# Altium PCB Kanaloa_v2.0.0_Power.PcbDoc (part 1 of 2)
Units mil, origin at the board's own origin, x right, y up, seen from the top; angles counter-clockwise.
Board outline 5000 x 6000 mil, 4 copper layers (Top Layer, GND, +24V, Bottom Layer), stack 62 mil thick; 146 components, 108 nets, 614 pads, 645 vias.
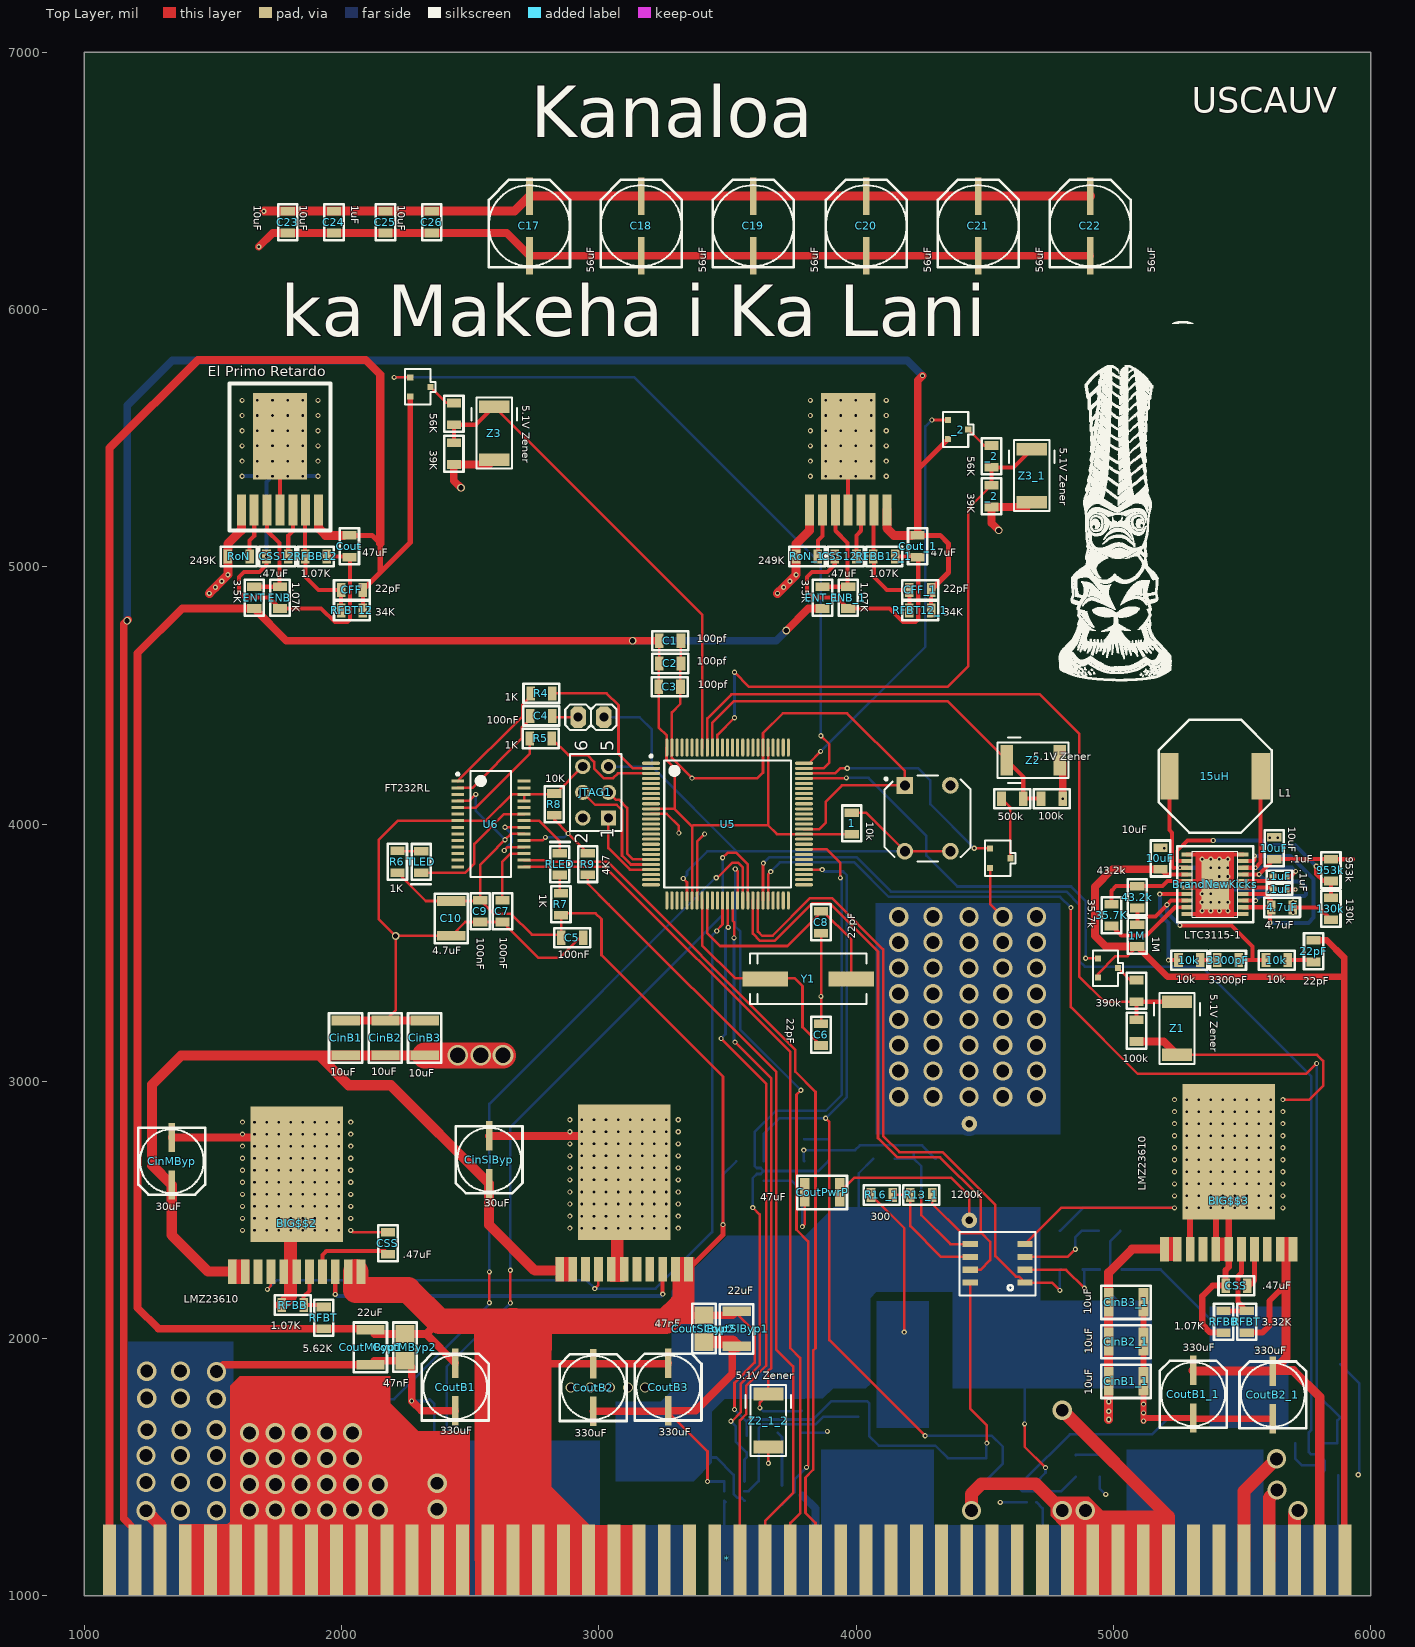
[diagram p0: Top Layer view]
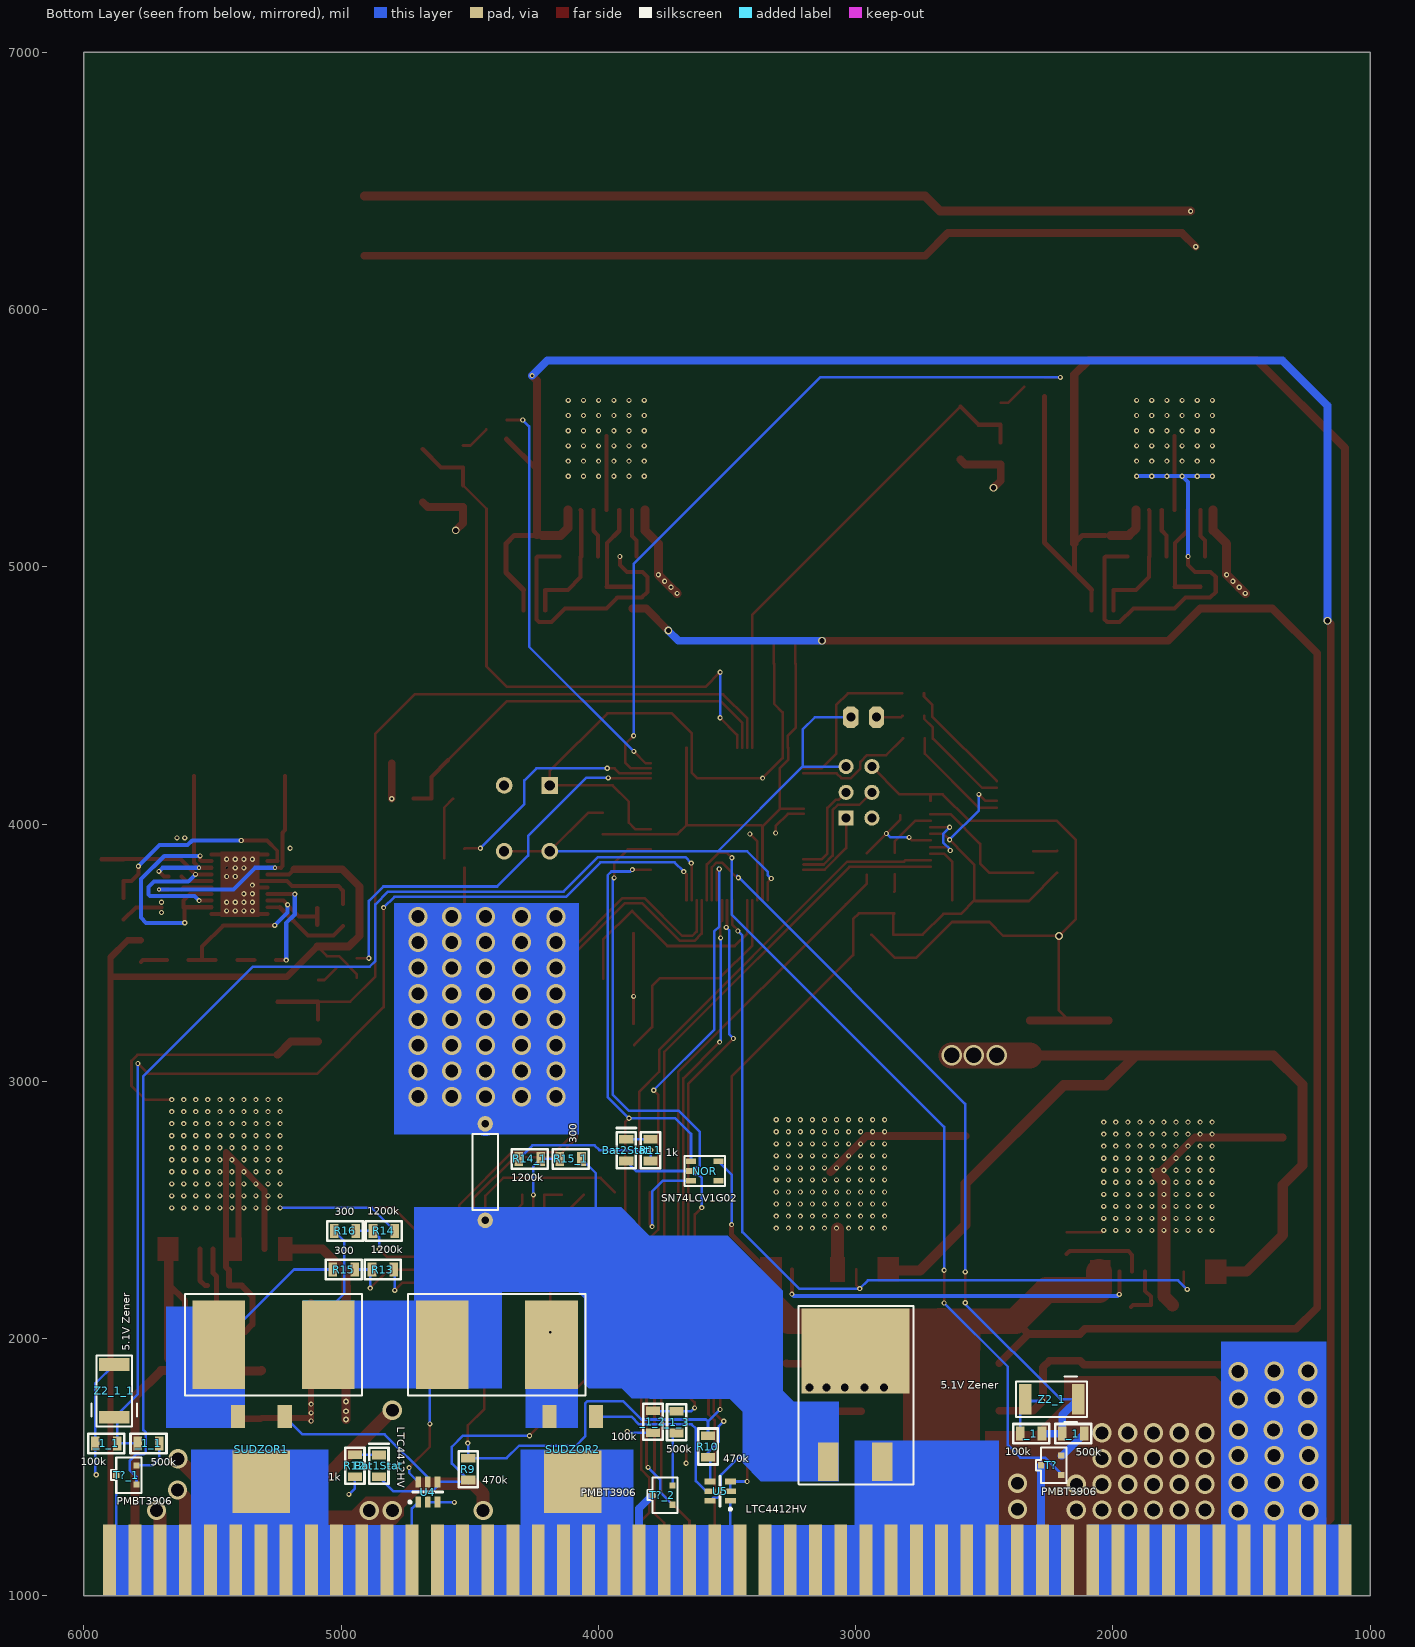
[diagram p1: Bottom Layer view, seen from below]
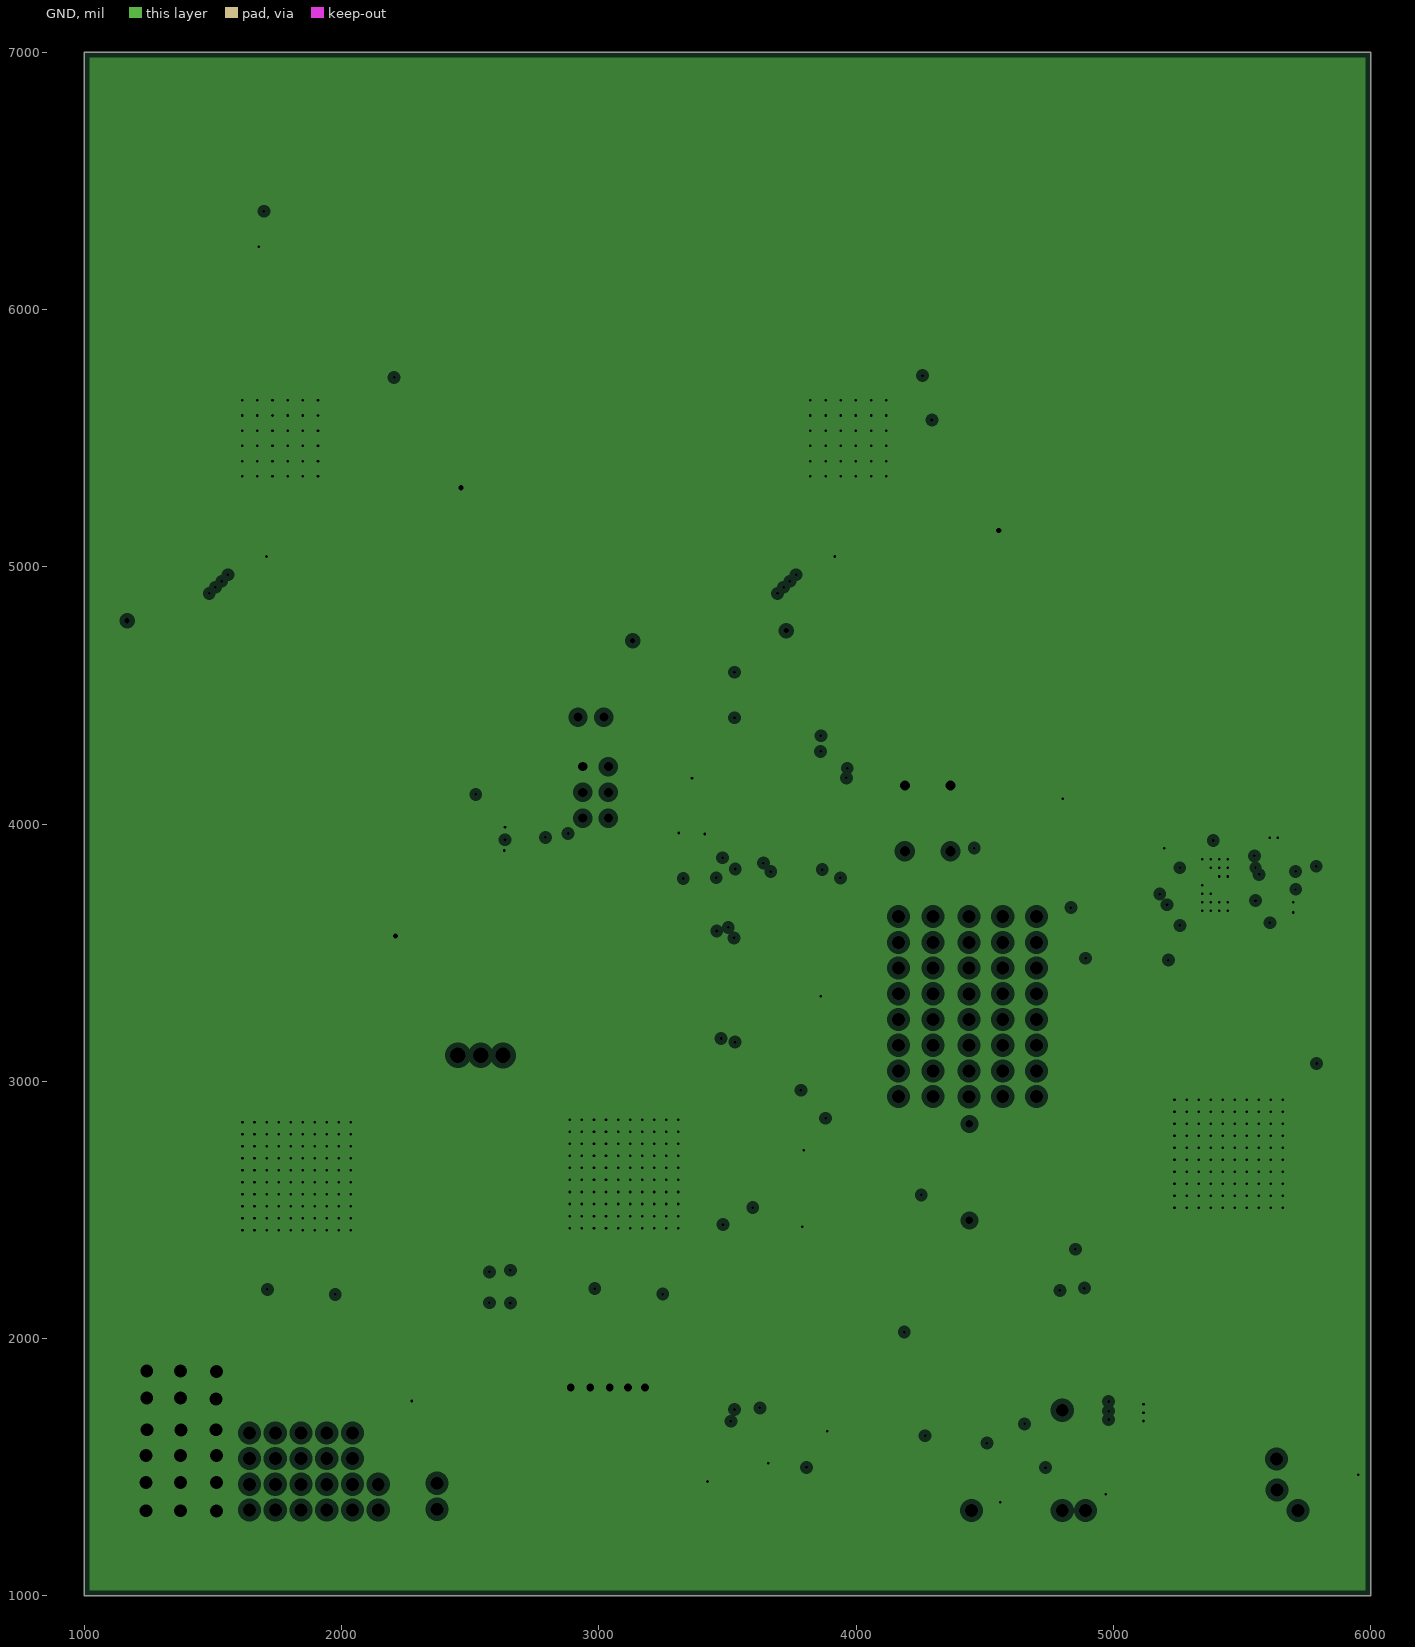
[diagram p2: GND, clearances drawn from the general rule]
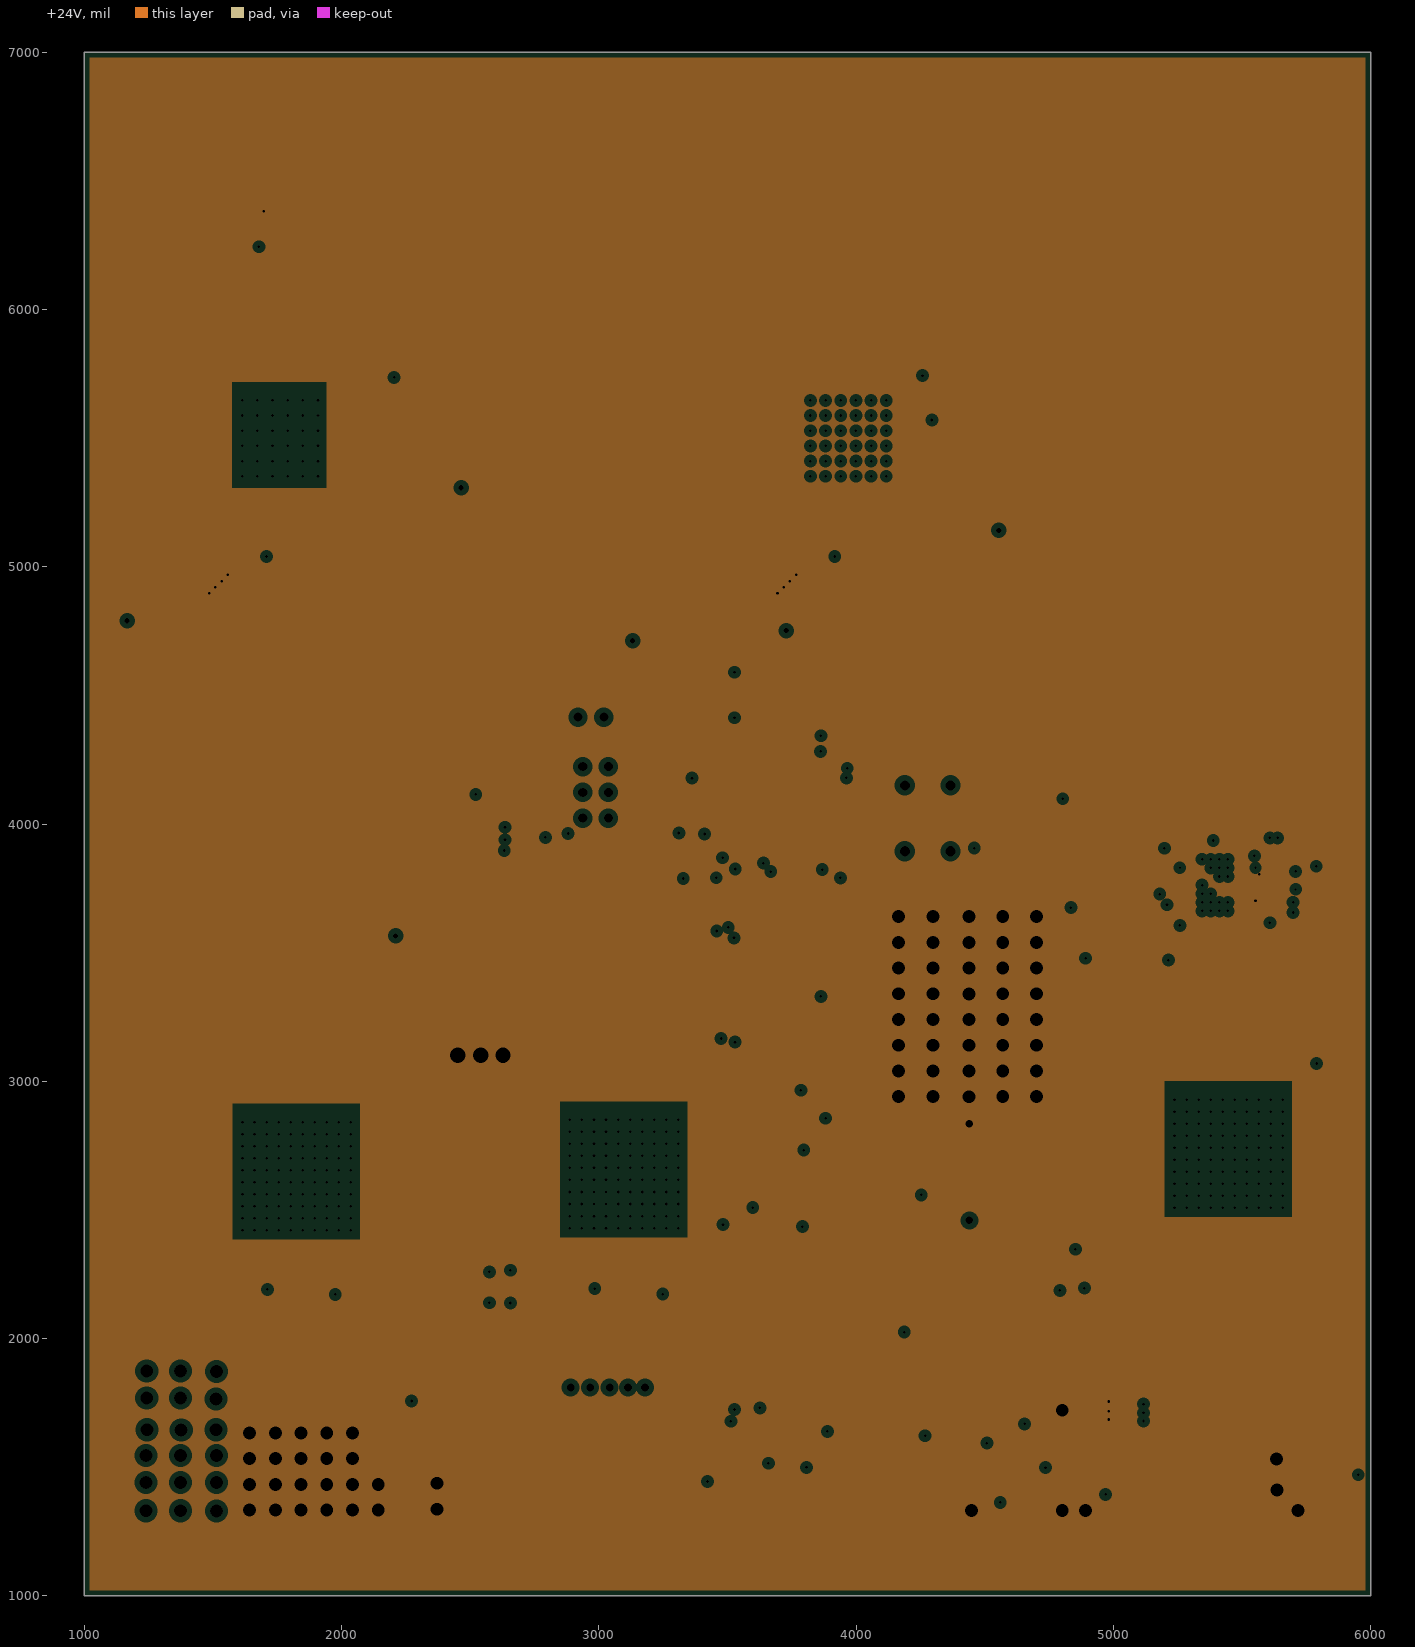
[diagram p3: +24V, clearances drawn from the general rule]

## Layer stack, top to bottom
Top Layer: signal copper 1.4
Dielectric: core 8.2, FR-4, Dk 4.8
GND: plane copper 1.4, net GND
Dielectric: prepreg 40, FR-4, Dk 4.8
+24V: plane copper 1.4, net +24V
Dielectric: core 8.2, FR-4, Dk 4.8
Bottom Layer: signal copper 1.4

## Board outline
1000,1000 1000,7000 6000,7000 6000,1000

## Design rules (kind name [scope] priority, off if disabled: settings)
Clearance [All] p1: gap=8
DiffPairsRouting [All] p1: maxlimit=10 minlimit=10 mostfreqgap=10 maxuncoupledlength=500
MinimumSolderMaskSliver [All] p1 off: minsoldermaskwidth=10
PlaneClearance [All] p1: clearance=20
PlaneConnect PlaneConnect_3 [(ObjectKind = 'Via') And (Net = '+24V') And (ViaDiameter = AsMils(80)) And (HoleDiameter = AsMils(60))] p1: planeconnectstyle=Direct reliefexpansion=20 reliefentries=4 reliefconductorwidth=10 reliefairgap=10
PlaneConnect PlaneConnect_2 [(ObjectKind = 'Via') And (Net = '+24V') And (ViaDiameter = AsMils(22)) And (HoleDiameter = AsMils(10))] p2: planeconnectstyle=Direct reliefexpansion=20 reliefentries=4 reliefconductorwidth=10 reliefairgap=10
PlaneConnect PlaneConnect_1 [(ObjectKind = 'Via') And (Net = 'GND') And (ViaDiameter = AsMils(20)) And (HoleDiameter = AsMils(10))] p3: planeconnectstyle=Direct reliefexpansion=20 reliefentries=4 reliefconductorwidth=10 reliefairgap=10
PlaneConnect [All] p4: planeconnectstyle=Relief reliefexpansion=20 reliefentries=4 reliefconductorwidth=10 reliefairgap=10
PolygonConnect [All] p1: connectstyle=Relief reliefconductorwidth=10 reliefentries=4 polygonreliefangle="90 Angle"
RoutingVias [All] p1: holewidth=28 width=50 viastyle="Through Hole" minholewidth=28 minwidth=50 maxholewidth=28 maxwidth=50
SilkToSilkClearance [All] p1 off: silktosilkclearance=10
SilkscreenOverComponentPads [All] p1 off: minsilkscreentomaskgap=10
SolderMaskExpansion [All] p1: expansion=4
Width [All] p1: maxlimit=710 minlimit=10 preferedwidth=10
22 further rules are at their usual default settings.

## Classes and differential pairs
component class "24 Volt Regulator": 1M 4.7uF 10k 10uF 15uH 35.7K 43.2k 130k 953k 3300pF .1uF BrandNewKicks Cff
component class "5 Volt Regulator": BIG$$2
component class "12 Volt Regulator": Cout ENB ENT RoN
component class Kanaloa_v2.0.0_Power: C17 C18 C19 C20 C21 C22 C23 C24 C25 C26 P1 P2 P3 P4 P5 P6 P7 P8 P9 P10 P11 P12 R9 R10 U4 U5
component class Microcontroller: 4.7uF C2 C3 C5 C6 C8 JTAG1 R4 R5 R6 R7 RLED TLED U5 USB1 Y1
differential pair NewDifferentialPair1: +"USB DP" -"USB DM"

## Components (designator, comment, footprint, x,y, rotation, side; value= is the part's Value field where it differs from the comment)
1 "10k" "R 0805 (2012) RESISTOR" 3983,4002 r270 top
1M "1M" "R 0805 (2012) RESISTOR" 5092.94,3565.92 r270 top (schematic designator Rtop)
4.7uF "4.7uF" "0805 (2012) Capacitor" 5655.54,3675.92 r0 top (schematic designator C1)
10k "10k" "R 0805 (2012) RESISTOR" 5635.54,3470.69 r180 top (schematic designator Rff)
10k "10k" "R 0805 (2012) RESISTOR" 5295.54,3470.69 r0 top (schematic designator Rfb)
10uF "10uF" "0805 (2012) Capacitor" 5182.94,3865.92 r90 top (schematic designator Co)
10uF "10uF" "0805 (2012) Capacitor" 5625.54,3905.92 r270 top (schematic designator Cin)
15uH "L1" WurstInductor 5395.54,4185.92 r90 top
22pF "22pF" "0805 (2012) Capacitor" 5778.38,3505.92 r90 top
35.7K "35.7k" "R 0805 (2012) RESISTOR" 4992.94,3645.92 r270 top (schematic designator Rt)
43.2k "43.2k" "R 0805 (2012) RESISTOR" 5092.94,3715.92 r270 top (schematic designator Rbot)
130k "130k" "R 0805 (2012) RESISTOR" 5845.54,3670.69 r270 top (schematic designator R2)
953k "953k" "R 0805 (2012) RESISTOR" 5845.54,3820.69 r270 top (schematic designator R1)
3300pF "3300pF" "0805 (2012) Capacitor" 5445.54,3470.69 r180 top (schematic designator Cfb)
* "EdgeCon" "5645235-3 CON" 5900,1140 r180 top
.1uF ".1uF" "0402 (1005) CAPACITOR" 5645.54,3745.92 r180 top (schematic designator Cbst2)
.1uF ".1uF" "0402 (1005) CAPACITOR" 5645.54,3795.92 r180 top (schematic designator Cbst1)
_1 "100k" "R 0805 (2012) RESISTOR" 2318,1630 r0 bottom
_1 "500k" "R 0805 (2012) RESISTOR" 2154,1630 r180 bottom
_1_1 "500k" "R 0805 (2012) RESISTOR" 5749,1592 r180 bottom
_1_1 "100k" "R 0805 (2012) RESISTOR" 5913,1592 r0 bottom
_1_2 "100k" "R 0805 (2012) RESISTOR" 3788,1676 r90 bottom
_1_3 "500k" "R 0805 (2012) RESISTOR" 3696,1675 r90 bottom
_2 "56K" "R 0805 (2012) RESISTOR" 4526.39,5429.09 r270 top
_2 "39K" "R 0805 (2012) RESISTOR" 4526.39,5274.56 r270 top
_2 "" PMBT_3906 4396.37,5533.6 r90 top
Bat1Stat "" "LED 0805" 4853.35,1504.55 r270 bottom
Bat2Stat "" "LED 0805" 3891.97,2732.26 r270 bottom
BIG$$2 "LMZ23610" LMZ23610 1862.02,2596.63 r0 top
BIG$$3 "LMZ23610" LMZ23610 5485.43,2684.17 r0 top
BrandNewKicks "LTC3115-1" LTC3115 5395.54,3765.92 r0 top
C1 "100pf" "0805 (2012) Capacitor" 3276.57,4712.6 r180 top
C2 "100pf" "0805 (2012) Capacitor" 3276.57,4624.02 r180 top
C3 "100pf" "0805 (2012) Capacitor" 3274.61,4533.46 r180 top
C4 "100nF" "0805 (2012) Capacitor" 2775.59,4420.28 r180 top
C5 "100nF" "0805 (2012) Capacitor" 2896,3558 r0 top
C6 "22pF" "0805 (2012) Capacitor" 3863.47,3181.07 r270 top
C7 "100nF" "0805 (2012) Capacitor" 2625,3661.42 r90 top (schematic designator C5)
C8 "22pF" "0805 (2012) Capacitor" 3863.47,3618.08 r90 top
C9 "100nF" "0805 (2012) Capacitor" 2538.39,3661.42 r90 top (schematic designator C5)
C10 "4.7uF" "1210 (3225) Capacitor" 2426.18,3632.87 r90 top
C17 "56uF" Radial_8mmDia_SME 2730,6325 r90 top
C18 "56uF" Radial_8mmDia_SME 3165,6325 r90 top
C19 "56uF" Radial_8mmDia_SME 3600,6325 r90 top
C20 "56uF" Radial_8mmDia_SME 4040,6325 r90 top
C21 "56uF" Radial_8mmDia_SME 4475,6325 r90 top
C22 "56uF" Radial_8mmDia_SME 4910,6325 r90 top
C23 "10uF" "0805 (2012) Capacitor" 1790,6340 r270 top
C24 "10uF" "0805 (2012) Capacitor" 1970,6340 r270 top
C25 "1uF" "0805 (2012) Capacitor" 2170,6340 r270 top
C26 "10uF" "0805 (2012) Capacitor" 2350,6340 r270 top
CFF "22pF" "0805 (2012) Capacitor" 2040,4910 r180 top
CFF_1 "22pF" "0805 (2012) Capacitor" 4249,4910 r180 top (schematic designator CFF)
CinB1 "10uF" "1210 (3225) Capacitor" 2015.75,3168.31 r90 top
CinB1_1 "10uF" "1210 (3225) Capacitor" 5049.21,1833.66 r180 top
CinB2 "10uF" "1210 (3225) Capacitor" 2170.28,3168.31 r90 top
CinB2_1 "10uF" "1210 (3225) Capacitor" 5049.21,1988.19 r180 top
CinB3 "10uF" "1210 (3225) Capacitor" 2322.83,3168.31 r90 top
CinB3_1 "10uF" "1210 (3225) Capacitor" 5049.21,2140.75 r180 top
CinMByp "30uF" Radial_6.3mmDia_SMD 1339.57,2688.98 r270 top
CinSlByp "30uF" Radial_6.3mmDia_SMD 2572.83,2694.88 r270 top
Cout "47uF" "0805 (2012) Capacitor" 2030,5080 r270 top
Cout_1 "47uF" "0805 (2012) Capacitor" 4239,5080 r270 top (schematic designator Cout)
CoutB1 "330uF" Radial_6.3mmDia_SMD 2441.93,1811.02 r90 top
CoutB1_1 "330uF" Radial_6.3mmDia_SMD 5310.04,1783.46 r90 top
CoutB2 "330uF" Radial_6.3mmDia_SMD 2978.35,1809.06 r90 top
CoutB2_1 "330uF" Radial_6.3mmDia_SMD 5620.08,1780.51 r90 top
CoutB3 "330uF" Radial_6.3mmDia_SMD 3268.7,1811.02 r90 top
CoutMByp1 "22uF" "1210 (3225) Capacitor" 2112.2,1965.55 r90 top
CoutMByp2 "47nF" "1206 (3216) Capacitor" 2246.06,1965.55 r90 top
CoutPwrP "47uF" "1210 (3225) Capacitor" 3868,2568 r180 top
CoutSlByp1 "22uF" "1210 (3225) Capacitor" 3535.43,2037.4 r90 top
CoutSlByp2 "47nF" "1206 (3216) Capacitor" 3408.46,2038.39 r90 top
CSS ".47uF" "0805 (2012) Capacitor" 2180,2370 r270 top
CSS ".47uF" "0805 (2012) Capacitor" 5478.41,2205.22 r0 top
CSS12 ".47uF" "0805 (2012) Capacitor" 1750,5040 r180 top (schematic designator CSS)
CSS12_1 ".47uF" "0805 (2012) Capacitor" 3959,5040 r180 top (schematic designator CSS)
ENB "1.07K" "R 0805 (2012) RESISTOR" 1760,4880 r90 top
ENB_1 "1.07K" "R 0805 (2012) RESISTOR" 3969,4880 r90 top (schematic designator ENB)
ENT "3.5K" "R 0805 (2012) RESISTOR" 1660,4880 r270 top
ENT_1 "3.5K" "R 0805 (2012) RESISTOR" 3869,4880 r270 top (schematic designator ENT)
JTAG1 "JTAG Header" HDR2X3 3037.01,4023.03 r90 top
NOR "SN74LCV1G02" SN74AHC1G00 3587,2651 r270 bottom
R4 "1K" "R 0805 (2012) RESISTOR" 2776.57,4507.87 r180 top
R5 "1K" "R 0805 (2012) RESISTOR" 2773.62,4332.68 r180 top
R6 "1K" "R 0805 (2012) RESISTOR" 2216.54,3853.35 r270 top
R7 "1K" "R 0805 (2012) RESISTOR" 2852,3688 r270 top
R8 "10K" "R 0805 (2012) RESISTOR" 2826.54,4076.35 r270 top (schematic designator R6)
R9 "4K7" "R 0805 (2012) RESISTOR" 2956.54,3844.35 r270 top (schematic designator R6)
R9 "470k" "R 0805 (2012) RESISTOR" 4505.91,1492.13 r90 bottom
R10 "470k" "R 0805 (2012) RESISTOR" 3574,1580 r90 bottom
R11 "1k" "R 0805 (2012) RESISTOR" 3797.48,2732.26 r270 bottom
R12 "1k" "R 0805 (2012) RESISTOR" 4946.85,1504.92 r270 bottom
R13 "1200k" "R 0805 (2012) RESISTOR" 4838,2268 r180 bottom
R13_1 "1200k" "R 0805 (2012) RESISTOR" 4253,2558 r0 top
R14 "1200k" "R 0805 (2012) RESISTOR" 4834,2418 r180 bottom
R14_1 "1200k" "R 0805 (2012) RESISTOR" 4267,2698 r0 bottom
R15 "300" "R 0805 (2012) RESISTOR" 4990,2268 r0 bottom
R15_1 "300" "R 0805 (2012) RESISTOR" 4108,2698 r180 bottom
R16 "300" "R 0805 (2012) RESISTOR" 4985,2418 r0 bottom
R16_1 "300" "R 0805 (2012) RESISTOR" 4100,2558 r180 top
RFBB "1.07K" "R 0805 (2012) RESISTOR" 1810,2130 r180 top
RFBB "1.07K" "R 0805 (2012) RESISTOR" 5428.41,2065.22 r90 top
RFBB12 "1.07K" "R 0805 (2012) RESISTOR" 1900,5040 r0 top (schematic designator RFBB)
RFBB12_1 "1.07K" "R 0805 (2012) RESISTOR" 4109,5040 r0 top (schematic designator RFBB)
RFBT "3.32K" "R 0805 (2012) RESISTOR" 5518.41,2065.22 r270 top
RFBT "5.62K" "R 0805 (2012) RESISTOR" 1930,2080 r90 top
RFBT12 "34K" "R 0805 (2012) RESISTOR" 2040,4830 r180 top (schematic designator RFBT)
RFBT12_1 "34K" "R 0805 (2012) RESISTOR" 4249,4830 r180 top (schematic designator RFBT)
RLED "LED" "LED 0805" 2848,3844 r270 top (schematic designator LED2)
RoN "249K" "R 0805 (2012) RESISTOR" 1600,5040 r0 top
RoN_1 "249K" "R 0805 (2012) RESISTOR" 3809,5040 r0 top (schematic designator RoN)
SUDZOR1 "" SUD50P04_13L 5310.04,1531.5 r0 bottom
SUDZOR2 "" SUD50P04_13L 4099.41,1531.5 r0 bottom
T? "PMBT3906" PMBT_3906 2240,1507 r270 bottom
T?_1 "PMBT3906" PMBT_3906 5835,1469 r270 bottom
T?_2 "PMBT3906" PMBT_3906 3751,1391 r270 bottom
TLED "LED" "LED 0805" 2309.06,3852.36 r90 top (schematic designator LED1)
U4 "LTC4412HV" SOT95P245X110-6N 4663,1403 r90 bottom
U5 "Atmega1280" Atmega1280 3500,4000 r0 top
U5 "LTC4412HV" SOT95P245X110-6N 3526.57,1406.5 r0 bottom
U6 "FT232RL" "FTDI 232 RL" 2580,4000 r0 top
Y1 "ECS-160-20-5P" CSM-7 3814,3398 r0 top
Z1 "5.1V Zener" DO-213AB_D 5247.31,3205.68 r270 top
Z2 "5.1V Zener" DO-213AB_D 4688.02,4247.92 r0 top
Z2_1 "5.1V Zener" DO-213AB_D 2238,1764 r0 bottom
Z2_1_1 "5.1V Zener" DO-213AB_D 5882,1796 r90 bottom
Z2_1_2 "5.1V Zener" DO-213AB_D 3659,1681 r270 top
Z3 "5.1V Zener" DO-213AB_D 2592.52,5519.69 r270 top
Z3_1 "5.1V Zener" DO-213AB_D 4682.89,5354.28 r270 top
? "" "Male 2X1" 2919,4415 r0 top
? "" AP358_SMD 4550,2217 r90 top
? "" WSLP5931L3000FE 4395,1976 r0 bottom
? "" WSLP5931L3000FE 5263,1976 r180 bottom
? "" PMBT_3906 2306,5699 r90 top
? "" PMBT_3906 4979,3440 r90 top
? "" PMBT_3906 4560,3867 r90 top
? "" FUZE 4439.96,2646.65 r0 bottom
? "39K" "R 0805 (2012) RESISTOR" 2436.02,5439.96 r270 top
? "56K" "R 0805 (2012) RESISTOR" 2436.02,5594.49 r270 top
? "390k" "R 0805 (2012) RESISTOR" 5089.83,3351.35 r90 top
? "100k" "R 0805 (2012) RESISTOR" 5089.83,3196.83 r270 top
? "500k" "R 0805 (2012) RESISTOR" 4607.31,4098.31 r180 top
? "100k" "R 0805 (2012) RESISTOR" 4760.85,4098.31 r180 top
? "" B3F-1000 4278,4022 r270 top
? "" VBT4045BP 3001,1781 r180 bottom

## Footprints (in the part's own frame and the unit in brackets; to place one, negate y for a bottom-side part, rotate by r counter-clockwise, add the part's x,y. Pads: shape width x height; smd on the part's side, far side on the other; paste and mask are expansions set on the pad)
"0402 (1005) CAPACITOR" [mm] "0402 (1005) Capacitor"
  rect 0.7x0.6 smd: 1(-0.65,0) 2(0.65,0)
  silkscreen extent -1.28,-0.55 1.28,0.55, body extent -0.6,-0.29 0.6,0.29, height 0.51
"0805 (2012) Capacitor" [mm] "0805 (2012) Capacitor"
  rect 0.85x1.4 smd: 1(-1.075,0) 2(1.075,0)
  silkscreen extent -1.78,-0.95 1.78,0.95, body extent -1.19,-0.65 1.19,0.65, height 0.85
"1206 (3216) Capacitor" [mm] "1206 (3216) Capacitor"
  rect 1.75x1.9 smd: 1(-1.325,0) 2(1.325,0)
  silkscreen extent -2.42,-1.15 2.45,1.15, body extent -1.73,-0.91 1.73,0.91, height 1.26
"1210 (3225) Capacitor" [mm] "1210 (3225) Capacitor"
  rect 0.95x2.8 smd: 1(-1.725,0) 2(1.725,0)
  silkscreen extent -2.45,-1.63 2.45,1.65, body extent -1.83,-1.43 1.83,1.43, height 1.81
"5645235-3 CON" [mil]
  rect 50x275 smd: 1(4802,0) 2(4704,0) 3(4606,0) 4(4508,0) 5(4410,0) 6(4312,0) 7(4214,0) 8(4116,0) 9(4018,0) 10(3920,0) 11(3822,0) 12(3724,0) 13(3626,0) 14(3528,0) 15(3430,0) 16(3332,0) 17(3234,0) 18(3136,0) 19(3038,0) 20(2940,0) 21(2842,0) 22(2744,0) 23(2646,0) 24(2548,0) 25(2450,0) 26(2352,0) 27(2254,0) 28(2156,0) 29(2058,0) 30(1960,0) 31(1862,0) 32(1764,0) 33(1666,0) 34(1568,0) 35(1470,0) 36(1372,0) 37(1274,0) 38(1176,0) 39(1078,0) 40(980,0) 41(882,0) 42(784,0) 43(686,0) 44(588,0) 45(490,0) 46(392,0) 47(294,0) 48(196,0) 49(98,0) 50(0,0)
  rect 50x275 smd far side: 51(4802,0) 52(4704,0) 53(4606,0) 54(4508,0) 55(4410,0) 56(4312,0) 57(4214,0) 58(4116,0) 59(4018,0) 60(3920,0) 61(3822,0) 62(3724,0) 63(3626,0) 64(3528,0) 65(3430,0) 66(3332,0) 67(3234,0) 68(3136,0) 69(3038,0) 70(2940,0) 71(2842,0) 72(2744,0) 73(2646,0) 74(2548,0) 75(2450,0) 76(2352,0) 77(2254,0) 78(2156,0) 79(2058,0) 80(1960,0) 81(1862,0) 82(1764,0) 83(1666,0) 84(1568,0) 85(1470,0) 86(1372,0) 87(1274,0) 88(1176,0) 89(1078,0) 90(980,0) 91(882,0) 92(784,0) 93(686,0) 94(588,0) 95(490,0) 96(392,0) 97(294,0) 98(196,0) 99(98,0) 100(0,0)
AP358_SMD [mm] "Dual Circuit OpAmp (Diodes)"
  rect 0.6x1.5 smd: 1(0,-2.7) 2(1.27,-2.7) 3(2.54,-2.7) 4(3.81,-2.7) 5(3.81,2.7) 6(2.54,2.7) 7(1.27,2.7) 8(0,2.7)
  silkscreen extent -1.25,-3.75 5,3.75, body extent -0.6,-3.02 4.42,3.02, height 1.6
Atmega1280 [mm] "TSQFP, 100-Leads, Body 14x14mm (max), Pitch 0.50mm, IPC Medium Density"
  oval 1.8x0.3 smd: 1(-7.55,6) 2(-7.55,5.5) 3(-7.55,5) 4(-7.55,4.5) 5(-7.55,4) 6(-7.55,3.5) 7(-7.55,3) 8(-7.55,2.5) 9(-7.55,2) 10(-7.55,1.5) 11(-7.55,1) 12(-7.55,0.5) 13(-7.55,0) 14(-7.55,-0.5) 15(-7.55,-1) 16(-7.55,-1.5) 17(-7.55,-2) 18(-7.55,-2.5) 19(-7.55,-3) 20(-7.55,-3.5) 21(-7.55,-4) 22(-7.55,-4.5) 23(-7.55,-5) 24(-7.55,-5.5) 25(-7.55,-6) 51(7.55,-6) 52(7.55,-5.5) 53(7.55,-5) 54(7.55,-4.5) 55(7.55,-4) 56(7.55,-3.5) 57(7.55,-3) 58(7.55,-2.5) 59(7.55,-2) 60(7.55,-1.5) 61(7.55,-1) 62(7.55,-0.5) 63(7.55,0) 64(7.55,0.5) 65(7.55,1) 66(7.55,1.5) 67(7.55,2) 68(7.55,2.5) 69(7.55,3) 70(7.55,3.5) 71(7.55,4) 72(7.55,4.5) 73(7.55,5) 74(7.55,5.5) 75(7.55,6)
  oval 0.3x1.8 smd: 26(-6,-7.55) 27(-5.5,-7.55) 28(-5,-7.55) 29(-4.5,-7.55) 30(-4,-7.55) 31(-3.5,-7.55) 32(-3,-7.55) 33(-2.5,-7.55) 34(-2,-7.55) 35(-1.5,-7.55) 36(-1,-7.55) 37(-0.5,-7.55) 38(0,-7.55) 39(0.5,-7.55) 40(1,-7.55) 41(1.5,-7.55) 42(2,-7.55) 43(2.5,-7.55) 44(3,-7.55) 45(3.5,-7.55) 46(4,-7.55) 47(4.5,-7.55) 48(5,-7.55) 49(5.5,-7.55) 50(6,-7.55) 76(6,7.55) 77(5.5,7.55) 78(5,7.55) 79(4.5,7.55) 80(4,7.55) 81(3.5,7.55) 82(3,7.55) 83(2.5,7.55) 84(2,7.55) 85(1.5,7.55) 86(1,7.55) 87(0.5,7.55) 88(0,7.55) 89(-0.5,7.55) 90(-1,7.55) 91(-1.5,7.55) 92(-2,7.55) 93(-2.5,7.55) 94(-3,7.55) 95(-3.5,7.55) 96(-4,7.55) 97(-4.5,7.55) 98(-5,7.55) 99(-5.5,7.55) 100(-6,7.55)
  silkscreen extent -7.67,-6.25 6.25,6.82, body extent -8,-8 8,8, height 1.03
B3F-1000 [mm] "OMRON Electronics Pushbutton Tactile SPST-NO 0.05A 24V"
  rect 1.65x1.65 hole 1: 1(-3.25,-2.25)
  round 1.65 hole 1: 2(3.25,-2.25) 3(-3.25,2.25) 4(3.25,2.25)
  silkscreen extent -4.25,-4.25 4.25,4.25, body extent -3.81,-3 3.89,3, height 4.3
CSM-7 [mm] "Quartz Crystal, SM; 2 Leads; Body 11.4 x 4.8 x 5 mm (LxWxH)"
  rect 4.5x1.5 smd: 1(-4.25,0) 2(4.25,0)
  silkscreen extent -5.75,-2.5 5.75,2.5
DO-213AB_D [mil] "Zener Diode 1.5V"
  rect 49x118 smd: N(-103,0) P(103,0)
  silkscreen extent -138,-89 138,89, body extent -102,-53 102,52, height 53
"FTDI 232 RL" [mm] "SOP, 28-Leads, Body 10.5x5.6mm (max), Pitch 0.65mm, IPC Medium Density"
  rect 1.25x0.3 smd: 1(-3.275,4.225) 2(-3.275,3.575) 3(-3.275,2.925) 4(-3.275,2.275) 5(-3.275,1.625) 6(-3.275,0.975) 7(-3.275,0.325) 8(-3.275,-0.325) 9(-3.275,-0.975) 10(-3.275,-1.625) 11(-3.275,-2.275) 12(-3.275,-2.925) 13(-3.275,-3.575) 14(-3.275,-4.225) 15(3.275,-4.225) 16(3.275,-3.575) 17(3.275,-2.925) 18(3.275,-2.275) 19(3.275,-1.625) 20(3.275,-0.975) 21(3.275,-0.325) 22(3.275,0.325) 23(3.275,0.975) 24(3.275,1.625) 25(3.275,2.275) 26(3.275,2.925) 27(3.275,3.575) 28(3.275,4.225)
  silkscreen extent -3.4,-5.25 2,5.25, body extent -3.93,-5.09 3.88,5.11, height 1.98
FUZE [mil]
  round 60 hole 30: 1(0,-187.52) 16(0,187.5)
  silkscreen extent -49,-148 49,148
HDR2X3 [mm] "Connector; Header; 3x2 Position"
  rect 1.5x1.5 hole 0.9: 1(0,0)
  round 1.5 hole 0.9: 2(0,2.54) 3(2.54,0) 4(2.54,2.54) 5(5.08,0) 6(5.08,2.54)
  silkscreen extent -1.27,-1.27 6.35,3.81
"LED 0805" [mm]
  rect 0.85x1.4 smd: 1(-1.075,0) 2(1.075,0)
  silkscreen extent -2.18,-0.95 1.78,0.97, body extent -1.19,-0.65 1.19,0.65, height 0.87
LMZ23610 [mm]
  rect 0.86x2.41 smd: 0(-7.29,-8.557) 1(-6.02,-8.557) 2(-4.75,-8.557) 3(-3.48,-8.557) 4(-2.21,-8.557) 5(-0.94,-8.557) 6(0.33,-8.557) 7(1.6,-8.557) 8(2.87,-8.557) 9(4.14,-8.557) 10(5.41,-8.557)
  rect 9.126x13.37 smd: 11(-0.94,1.043)
LTC3115 [mm] "TSSOP, 20-Leads, Body 6.6x4.5mm (max), Pitch 0.65mm, IPC Medium Density"
  rect 1.05x0.4 smd: 1(-2.775,2.925) 2(-2.775,2.275) 3(-2.775,1.625) 4(-2.775,0.975) 5(-2.775,0.325) 6(-2.775,-0.325) 7(-2.775,-0.975) 8(-2.775,-1.625) 9(-2.775,-2.275) 10(-2.775,-2.925) 11(2.775,-2.925) 12(2.775,-2.275) 13(2.775,-1.625) 14(2.775,-0.975) 15(2.775,-0.325) 16(2.775,0.325) 17(2.775,0.975) 18(2.775,1.625) 19(2.775,2.275) 20(2.775,2.925)
  rect 2.74x4.95 smd: 21(0,0)
  silkscreen extent -3.75,-3.75 3.75,3.75, body extent -3.16,-3.35 3.12,3.15, height 1.1
"Male 2X1" [mil]
  oct 60x85 hole 35: 1(0,0) 2(100,0)
  silkscreen extent -50,-50 150,50, body extent -50,-50 150,50, height 460
PMBT_3906 [mm] "PNP Switching Transistor"
  rect 0.6x0.6 smd: B(0.95,1) C(0,-1) E(-0.95,1)
  silkscreen extent -1.75,-1.5 1.75,1.5, body extent -1.45,-1.21 1.45,1.21, height 0.98
"R 0805 (2012) RESISTOR" [mm] "0805 (2012) Resistor"
  rect 0.85x1.4 smd: 1(-1.075,0) 2(1.075,0)
  silkscreen extent -1.78,-0.95 1.78,0.95, body extent -1.19,-0.65 1.19,0.65, height 0.85
Radial_6.3mmDia_SMD [mm] "Surface Mount Aluminum Electrolytic Capacitor"
  rect 2.9x0.65 smd: N(-2.35,0) P(2.35,0)
  silkscreen extent -3.3,-3.3 3.3,3.3, body extent -3.45,-3.3 3.55,3.3, height 7.7
Radial_8mmDia_SME [mm] "Surface Mount Aluminum Electrolytic Capacitor"
  rect 3.7x0.65 smd: N(-2.95,0) P(2.95,0)
  silkscreen extent -4.08,-4 4.58,4.03, body extent -4.92,-4.15 4.98,4.15, height 10.2
SN74AHC1G00 [mm]
  rect 0.55x1 smd: 10(-0.95,1.35) 11(0.95,1.35) 12(0,-1.35) 13(-0.95,-1.35) 14(0.95,-1.35)
  silkscreen extent -1.5,-2 1.5,2, body extent -1.5,-0.75 1.5,0.75, height 1.45
SOT95P245X110-6N [mm] "SOT23, 6-Leads, Body 3.0x2.6mm (max), Pitch 0.95mm, IPC Medium Density"
  rect 1.1x0.55 smd: 1(-1,0.95) 2(-1,0) 3(-1,-0.95) 4(1,-0.95) 5(1,0) 6(1,0.95)
  silkscreen extent -1.12,-1.5 0.05,1.9, body extent -1.41,-1.45 1.41,1.45, height 1
SUD50P04_13L [mil] "P CHANNEL POWER MOSFET"
  rect 224x243 smd: D(0,88.5)
  rect 55x90 smd: G(-90.55,-165) S(90.55,-165)
  body extent -130,-188 130,193, height 91
VBT4045BP [mil] "Vishay Shotkey Diode."
  rect 80x150 smd: 2(105,-260) ""(-105,-260)
  rect 420x330 smd: GND(0,170)
  silkscreen extent -221,-348 225,345, body extent -197,-297 197,319, height 188
WSLP5931L3000FE [mil] "Vishay Current Sense Resistor"
  rect 205x344 smd: 1(-212.5,0) 2(212.5,0)
  silkscreen extent -344,-197 344,197, body extent -203,-106 201,109, height 39
WurstInductor [mm]
  rect 4.6x1.8 smd: 1(0,4.5) 2(0,-4.5)
  silkscreen extent -5.59,-5.59 5.59,5.59, body extent -5,-5.07 5,4.93, height 3.81

## Part data
1M 10k 10k 35.7K 43.2k 130k 953k ENB ENB_1 ENT ENT_1 R4 R5 R6 R7 R8 R9 R9 R10 RFBB RFBB RFBB12 RFBB12_1 RFBT RFBT RFBT12 RFBT12_1 RoN RoN_1: library part Resistor, "Resistor"
4.7uF 10uF 10uF 3300pF .1uF .1uF C4 C5 C7 C9 C23 C24 C25 C26 CFF CFF_1 Cout Cout_1 CSS CSS CSS12 CSS12_1: library part "Capacitor (non-polarized)", "Capacitor"
15uH: library part Inductor
C1 C2 C3 C6 C8: library part Cap, "Capacitor"
C17 C18 C19 C20 C21 C22: library part "Capacitor (polarized)", "Capacitor (polarized)"
JTAG1: library part "Header 3X2", "Header, 3-Pin, Dual row"
RLED TLED: "Standard LED"
U4 U5: library part LTC4412, "Low Loss Power Path Controller in Thin SOT"
Y1: library part ECS-120-32-1, "Crystal Oscillator"

## Free pads (board coordinates)
  rect 35.04x120.47 smd: 0(1610,5220) 0(3819,5220) 1(1660,5220) 1(3869,5220) 2(1710,5220) 2(3919,5220) 3(1760,5220) 3(3969,5220) 4(1810,5220) 4(4019,5220) 5(1860,5220) 5(4069,5220) 6(1910,5220) 6(4119,5220)
  rect 33.86x94.88 smd: 0(2847.95,2268.86) 1(2897.95,2268.86) 2(2947.95,2268.86) 3(2997.95,2268.86) 4(3047.95,2268.86) 5(3097.95,2268.86) 6(3147.95,2268.86) 7(3197.95,2268.86) 8(3247.95,2268.86) 9(3297.95,2268.86) 10(3347.95,2268.86)
  rect 210.63x336.22 smd: 7(1760,5507.6) 7(3969,5507.6)
  rect 359.29x526.38 smd: 11(3097.95,2646.81)

## Via types
v1: diameter 20, hole 10, Top Layer to Bottom Layer, 535 vias
v2: diameter 75, hole 50, Top Layer to Bottom Layer, 89 vias
v3: diameter 30, hole 20, Top Layer to Bottom Layer, 6 vias
v4: diameter 40, hole 30, Top Layer to Bottom Layer, 5 vias
v5: diameter 22, hole 10, Top Layer to Bottom Layer, 3 vias
v6: diameter 80, hole 60, Top Layer to Bottom Layer, 3 vias
v7: diameter 15.75, hole 7.87, Top Layer to Bottom Layer, 3 vias
v8: diameter 10, hole 10, Top Layer to Bottom Layer, 1 vias

## Nets (pads, with @x,y where several pads share a name; then routed paths per layer and width w, separated by ;. In a path a pad name is that pad's centre, name@x,y a point inside that pad or via, vN(x,y) a via of type N, cw(c..) or ccw(c..) an arc to the next point about the centre after c; other vN are vias at no path point)
3v3: C7.2 U6.17 | length 246.6
  Top Layer w10: C7.2@2625,3703.74 2625,3853.35 2656.5,3884.84 U6.17@2708.94,3884.84
12mon: ?.1@2436.02,5482.28 ?.2@2436.02,5552.17 U5.93 Z3.N | length 1916.2
  Top Layer w10: Z3.N@2592.52,5622.69 3401.57,4813.63 U5.93@3401.57,4297.24
  Top Layer w15.75: ?.1@2436.02,5482.28 ?.2@2436.02,5552.17 2522,5552.17 Z3.N@2592.52,5622.69
12Sel: ?.B@2266.63,5736.4 U5.74 | length 2915.8
  Top Layer w10: v1(2204,5736) 2266.23,5736 ?.B@2266.63,5736.4 ; U5.74@3797.24,4216.54 3873.54,4216.54 3896,4239 3896,4310 v1(3863,4343)
  Bottom Layer w10: v1(2204,5736) 3138,5736 3863,5011 v1(3863,4343)
24mon: ?.1@5089.83,3239.15 ?.1@5089.83,3309.03 U5.92 Z1.N | length 3096
  Top Layer w10: U5.92@3421.26,4297.24 3421.26,4410.43 3514.76,4503.94 4714.06,4503.94 4867,4351 4867,3406.87 4964.83,3309.03 ?.1@5089.83,3309.03
  Top Layer w15.75: ?.1@5089.83,3239.15 ?.1@5089.83,3309.03 5246.97,3309.03 Z1.N@5247.31,3308.68
24Sel: ?.B@4939.63,3477.4 U5.72 | length 1609.3
  Top Layer w10: U5.72@3797.24,4177.17 3960.17,4177.17 v1(3962,4179) ; v1(4892,3478) 4939.03,3478 ?.B@4939.63,3477.4
  Bottom Layer w10: v1(3962,4179) 4048,4179 4273,3954 4273,3877.37 4393.37,3757 4836,3757 4892,3701 v1(4892,3478)
+3.3V: *.49 BIG$$3.9 BIG$$3.10 CoutB1_1.P CoutB2_1.P RFBT.2@5518.41,2022.89 | length 1947.9
  Top Layer w23.62: RFBT.2@5518.41,2022.89 5579.47,2022.89 5606.77,2050.2 5606.77,2146.18 5670.28,2209.69 5670.28,2211.61 ; *.49@5800,1142 *.49@5802,1140
  Top Layer w35.43: CoutB1_1.P@5310.04,1875.98 5312.99,1873.03 CoutB2_1.P@5620.08,1873.03 CoutB2_1.P@5622.05,1875 ; 5670.28,2209.69 5670.28,1923.23 CoutB2_1.P@5622.05,1875 ; 5670.28,2211.61 5670.28,2345.47 ; *.49@5802,1140 5802,1772.8 5699.8,1875 CoutB2_1.P@5622.05,1875
+5V: 1.2 *.16 *.17 *.18 *.19 *.20 *.21 *.22 ?.8 BIG$$2.9 BIG$$2.10 C1.2 C2.2 C3.2 C5.1 C9.2 C10.2 CoutB1.P CoutB2.P CoutB3.P CoutMByp1.2 CoutMByp2.2 CoutSlByp1.2 CoutSlByp2.2 ENT.2 ENT_1.2 NOR.10 pad.9 pad.10 R6.2 R7.2 R9.2@4505.91,1534.45 R10.2 RFBT.1@1930,2037.68 U5.10 U5.31 U5.61 U5.80 U5.100 U6.4 U6.20 | length 18017.1
  Top Layer w10: R6.2@2216.54,3811.02 2326.77,3700.79 C10.2@2426.18,3700.79 2535.43,3700.79 C9.2@2538.39,3703.74 ; U6.4@2451.06,4089.57 2495.57,4089.57 v1(2521,4115) ; U6.20@2708.94,3961.61 2657.76,3961.61 v1(2635,3938.86) 2604.33,3908.19 2604.33,3906.92 2538.39,3840.97 C9.2@2538.39,3703.74 ; U5.10@3202.76,4059.06 3293.31,4059.06 ; C1.2@3234.25,4712.6 C2.2@3234.25,4624.02 3232.28,4622.05 C3.2@3232.28,4533.46 3232.28,4375 3263.78,4343.5 U5.100@3263.78,4297.24 ; U5.100@3262.56,4297.24 3262.56,4249.25 3294.29,4217.52 3294.29,4060.04 3293.31,4059.06 ; U5.31@3362.2,3702.76 3362.2,3990.16 ; v1(3482.28,2442.91) 3482.28,3017.72 3010,3490 3010,3630 2987.44,3652.56 2849.41,3652.56 2853.58,3648.39 2853.58,3570 2739.6,3570 2658.77,3650.83 2591.3,3650.83 C9.2@2538.39,3703.74 ; v1(3527,1724) 3527,1827.57 3605.55,1906.12 3605.55,2026.22 3535.43,2096.34 CoutSlByp1.2@3535.43,2105.31 ; U5.80@3657.48,4297.24 3657.48,3995.08 ; 1.2@3983,3959.68 3982.05,3960.63 U5.61@3797.24,3960.63 3691.93,3960.63 3657.48,3995.08 ; ?.8@4443.7,2217 4443.7,1726.3 4508,1662 v1(4508,1593) ; 3293.31,4059.06 3362.2,3990.16 ; 3362.2,3990.16 3367.13,3995.08 3657.48,3995.08
  Top Layer w20: pad.10@3347.95,2268.86 3482.28,2403.19 v1(3482.28,2442.91)
  Top Layer w30: 2378.94,2066.93 2329.72,2017.72 2327.76,2017.72 ; CoutB1.P@2441.93,1903.54 2327.76,2017.72 ; 2666,1967.52 2731.94,1901.57 CoutB2.P@2978.35,1901.57 3266.73,1901.57 CoutB3.P@3268.7,1903.54 ; C1.2@3234.25,4712.6 v3(3131,4712.6) 1785.08,4712.6 ENT.2@1660,4837.68 1380,4837.68 1206,4663.68 1206,2119.79 1288.11,2037.68 RFBT.1@1930,2037.68 2107.99,2037.68 CoutMByp1.2@2112.2,2033.46 2127.95,2017.72 CoutMByp2.2@2246.06,2017.72 2327.76,2017.72 ; 3320.87,2127.95 3358.27,2090.55 CoutSlByp2.2@3408.46,2090.55 3520.67,2090.55 CoutSlByp1.2@3535.43,2105.31 ; v3(3728,4752) 3813.68,4837.68 ENT_1.2@3869,4837.68
  Top Layer w100: 2054.13,2259.84 2054.13,2187.99 2257.87,2187.99 2378.94,2066.93 3259.84,2066.93 3320.87,2127.95
  Top Layer w300: *.17@2666,1152.8 2666,1967.52
  Bottom Layer w10: v1(2521,4115) 2521,4052.86 v1(2635,3938.86) ; v1@3483.27,2441.93 v1(3482.28,2442.91) 3482.28,2636.83 NOR.10@3533.85,2688.4 ; v1(3527,1724) 3574,1677 ; R10.2@3574,1622.32 3574,1677 ; v1(4508,1593) 4505.91,1590.91 R9.2@4505.91,1534.45 4356.76,1534.45 4308.21,1583 4088,1583 4051.36,1619.64 4051.36,1747.71 4042.57,1756.5 3903.95,1756.5 3832.46,1685 3582,1685 3574,1677
  Bottom Layer w30: v3(3131,4712.6) 3688.6,4712.6 v3(3728,4752)
+12V: *.1 ?.E@2266.63,5661.6 CFF.1 Cout.1 pad.6@1910,5220 RFBT12.1 | length 7551.4
  Top Layer w15.75: Cout.1@2007.68,5122.32 Cout.1@2030,5122.32 ; RFBT12.1@2082.32,4830 CFF.1@2082.32,4910
  Top Layer w19.68: Cout.1@2030,5122.32 2117.68,5122.32 2150,5090 2150,4977.68 ; CFF.1@2082.32,4910 2150,4977.68 ; ?.E@2266.63,5661.6 2266.63,5094.31 2150,4977.68
  Top Layer w31.5: *.1@1098,1140 1098,5461.19 1440.94,5804.13 2093.5,5804.13 2150,5747.64 2150,5090
  Top Layer w35.04: pad.6@1910,5220 1910,5150 1937.68,5122.32 Cout.1@2007.68,5122.32
+12V_disp: *.2 _2.E CFF_1.1 Cout_1.1 pad.6@4119,5220 RFBT12_1.1 | length 9030.4
  Top Layer w15.75: RFBT12_1.1@4291.32,4830 CFF_1.1@4291.32,4910
  Top Layer w19.68: Cout_1.1@4239,5122.32 4326.68,5122.32 4359,5090 4359,4977.68 CFF_1.1@4291.32,4910 ; 4239,5378.2 _2.E@4357,5496.2
  Top Layer w30: v3@1169,4794 1153,4778 1153,1300 1196,1257 *.2@1196,1140 ; Cout_1.1@4239,5122.32 4239,5378.2 4239,5724 v1(4258,5743)
  Top Layer w35.04: 4119,5150 4146.68,5122.32 Cout_1.1@4216.68,5122.32
  Bottom Layer w30: v3(1166,4790) 1166,5627 1341,5802 4199,5802 v1(4258,5743)
+24Pre: ?. ?.2@4607.5,1976 ?.2@5050.5,1976 ?.16 CoutPwrP.1 R15_1.2 R16.2 U4.6 U5.6@3565.94,1369.09 | length 2672.7
  Top Layer w10: CoutPwrP.1@3935.91,2568 3991.91,2624 4370,2624 4439.96,2554.04 ?.16@4439.96,2459.15 ; v1(4655,1668) 4655,1579 v1(4736,1498)
  Bottom Layer w10: 3279.65,1537.4 3456.18,1537.4 3523.86,1469.72 3523.86,1394.89 3538.08,1380.67 3554.37,1380.67 U5.6@3565.94,1369.09 ; 4010,2479 4010,2642.32 R15_1.2@4065.68,2698 ; 4410.5,2173 ?.2@4607.5,1976 4655,1928.5 v1(4655,1668) ; U4.6@4700.4,1442.37 4736,1477.97 v1(4736,1498) ; R16.2@5027.32,2418 4988,2378.68 4988,2174 5050.5,2111.5 ?.2@5050.5,1976
  Bottom Layer w50: ?.16@4426.67,2461.12 4439.96,2461.12 ?.16@4439.96,2459.15
+24V: 10uF.2@5625.54,3863.6 953k.1 *.4 *.5 *.6 *.7 *.8 *.9 *.10 *.11 *.12 *.13 *.14 *.15 *.39 *.40 *.41 *.42 *.43 *.46 *.47 *.48 ?.1@4439.96,2834.17 ?.E@4520.63,3829.6 BIG$$2.0 BIG$$2.1 BIG$$3.0 BIG$$3.1 BrandNewKicks.13 BrandNewKicks.17 C17.P C18.P C19.P C20.P C21.P C22.P C23.1 C24.1 C25.1 C26.1 CinB1.1 CinB1_1.2 CinB2.1 CinB2_1.2 CinB3.1 CinB3_1.2 CinMByp.P CinSlByp.P pad.0 pad.1@2897.95,2268.86 RoN.1 RoN_1.1 | length 14997
  Top Layer w10: ?.E@4520.63,3829.6 4520.63,3689.37 v2(4570,3640)
  Top Layer w15.75: BrandNewKicks.13@5504.8,3701.94 v1(5552.35,3701.94) ; BrandNewKicks.17@5504.8,3804.31 v1(5566.25,3804.31) 10uF.2@5625.54,3863.6 5844.95,3863.6 953k.1@5845.54,3863.01 5931.29,3863.01
  Top Layer w35.04: v1(1485.24,4896.65) v1(1508.86,4920.28) v1(1557.68,4969.09) RoN.1@1557.68,5040 1557.68,5088.94 1610,5141.26 pad.0@1610,5220 ; v1(1697.68,6382.32) C23.1@1790,6382.32 C24.1@1970,6382.32 C25.1@2170,6382.32 C26.1@2350,6382.32 2671.18,6382.32 C17.P@2730,6441.14 C18.P@3165,6441.14 C19.P@3600,6441.14 C20.P@4040,6441.14 C21.P@4475,6441.14 C22.P@4910,6441.14 ; v1(3766.68,4969.09) RoN_1.1@3766.68,5040 3766.68,5088.94 3819,5141.26 pad.0@3819,5220
  Top Layer w35.43: 4980.31,2201.77 4980.31,1834.65 CinB1_1.2@4981.3,1833.66 v5(4981.3,1754.92) v5(4981.3,1717.52) v5(4981.3,1685.04) ; CinB3_1.2@4981.3,2140.75 4981.3,2255.91 5072.66,2347.26 BIG$$3.0@5198.41,2347.26
  Top Layer w39.37: BIG$$2.0@1575,2259.72 1481.42,2259.72 1339.57,2401.57 CinMByp.P@1339.57,2596.46 1263,2673.02 1263,2987.41 1375.98,3100.39 1911.42,3100.39 ; CinB3.1@2322.83,3100.39 CinB2.1@2170.28,3100.39 CinB1.1@2015.75,3100.39 1911.42,3100.39 ; 2869.09,2263.78 2750.98,2263.78 2572.83,2441.93 CinSlByp.P@2572.83,2602.36 2190.94,2984.25 2027.56,2984.25 1911.42,3100.39
  Top Layer w50: v2(4448,1331) 4448,1396 4487,1435 4697,1435 v2(4801,1331) ; v2(4801,1721) 5214,1308 *.43@5214,1140 ; *.46@5508,1140 5508,1406 v2(5634,1532) ; *.47@5606,1140 5606,1381 v2(5636,1411) ; *.48@5704,1140 5704,1317 v2(5718,1331)
  Top Layer w100: CinB3.1@2322.83,3100.39 v6(2626.97,3100.39)
  Bottom Layer w15.75: v1(5552.35,3701.94) 5570.41,3720 5742.46,3720 5748.38,3725.92 5748.38,3755.92 5728.38,3775.92 5594.48,3775.92 v1@5566.25,3804.15
  Bottom Layer w100: v2(4165,3040) v2(4165,3140) v2(4165,3240) v2(4165,3340) v2(4165,3440) v2(4165,3540) v2(4165,3640) ; v2(4299,3040) v2(4299,3140) v2(4299,3240) v2(4299,3340) v2(4299,3440) v2(4299,3540) v2(4299,3640) ; v2(4438.98,3639.76) v2(4438.98,3539.76) v2(4438.98,3439.76) v2(4438.98,3339.76) v2(4438.98,3239.76) v2(4438.98,3139.76) v2(4438.98,3039.76) v2(4438.98,2939.76) 4438.98,2837.13 ?.1@4439.96,2836.14 ; v2(4570,3040) v2(4570,3140) v2(4570,3240) v2(4570,3340) v2(4570,3440) v2(4570,3540) v2(4570,3640) ; v2(4701,3040) v2(4701,3140) v2(4701,3240) v2(4701,3340) v2(4701,3440) v2(4701,3540) v2(4701,3640)
  other v1: 3694.24,4896.65 3717.86,4920.28 1533.46,4943.9 3742.46,4943.9
  other v2: 4891,1331 1642,1333 1742,1333 1842,1333 1942,1333 2042,1333 2142,1333 2371,1336 1642,1433 1742,1433 1842,1433 1942,1433 2042,1433 2142,1433 2371,1437 1642,1533 1742,1533 1842,1533 1942,1533 2042,1533 1642,1633 1742,1633 1842,1633 1942,1633 2042,1633 4165,2940 4299,2940 4570,2940 4701,2940
  other v6: 2451.77,3101.38 2540.35,3101.38
+24Vreg: 1M.2 10uF.1@5182.94,3823.6 22pF.2 *.50 ?.E@4939.63,3402.6 BrandNewKicks.4 | length 4319.4
  Top Layer w10: ?.E@4939.63,3402.6 4939.63,3416.63 5009,3486 5055.35,3486 1M.2@5092.94,3523.6
  Top Layer w15: 5202.24,3804.31 BrandNewKicks.4@5286.29,3804.31
  Top Layer w15.75: 10uF.1@5182.94,3823.6 5202.24,3804.31 ; *.50@5896.77,1143.23 *.50@5900,1140
  Top Layer w20: 5895.85,3405.92 5896.77,3405
  Top Layer w25: 1M.2@5092.94,3523.6 5210.62,3405.92 5598.38,3405.92 5895.85,3405.92 ; 22pF.2@5778.38,3548.24 5829.76,3548.24 5896.77,3481.23 5896.77,3405 *.50@5896.77,1143.23
  Top Layer w30: 1M.2@5092.94,3523.6 4970.7,3523.6 4928.38,3565.92 4928.38,3755.92 4996.06,3823.6 10uF.1@5182.94,3823.6
Bat1_current: ?.1@4656.3,2217 R13.2 U5.44 | length 2617.4
  Top Layer w10: U5.44@3618.11,3702.76 3618.11,3582.17 3634.69,3565.59 3674.87,3565.59 3821.42,3712.13 3905.53,3712.13 4104.91,3512.76 4104.91,2787.38 4168.28,2724 4250,2724 4335.04,2724 4541,2518.04 4541,2319.75 4620.56,2240.19 4633.11,2240.19 ?.1@4656.3,2217 4762,2217 v1(4792,2187)
  Bottom Layer w10: v1(4792,2187) 4792,2264.32 R13.2@4795.68,2268
bat1_emitter: _1_1.2@5706.68,1592 T?_1.E | length 158.8
  Bottom Layer w10: _1_1.2@5706.68,1592 5706.68,1533.32 5733.6,1506.4 T?_1.E@5795.63,1506.4
bat1_opampM: ?.2@4656.3,2267 R13.1 R15.1 | length 402.2
  Top Layer w10: ?.2@4656.3,2267 4816,2267 v1(4887,2196)
  Bottom Layer w10: v1(4887,2196) 4887,2261.32 R13.1@4880.32,2268 R15.1@4947.68,2268
bat1_opampP: ?.3@4656.3,2317 R14.1 R16.1 | length 355.6
  Top Layer w10: ?.3@4656.3,2317 4822,2317 v1(4852,2347)
  Bottom Layer w10: v1(4852,2347) 4852,2393.68 R14.1@4876.32,2418 R16.1@4942.68,2418
Bat1VoltageSel: T?_1.B U5.45 | length 4412.9
  Top Layer w10: U5.45@3637.8,3702.76 3637.8,3846.46 v1(3639.17,3847.83)
  Bottom Layer w10: v1(3639.17,3847.83) 3662.33,3871 4001,3871 4135,3737 4817.72,3737 4867,3687.72 4867,3467.64 4888.96,3445.69 5343.31,3445.69 5769,3020 5769,1643.97 5759.59,1634.56 5759.59,1558.23 5768.38,1549.44 5797.43,1549.44 5822.44,1524.43 5822.44,1488.38 5795.63,1461.57 T?_1.B@5795.63,1431.6
bat2_current: ?.7 R13_1.2 U5.43 | length 2609.6
  Top Layer w10: U5.43@3598.43,3702.76 3598.43,3573.57 3626.41,3545.59 3683.16,3545.59 3829.7,3692.13 3897.24,3692.13 4084.91,3504.47 4084.91,2779.09 4160,2704 4326.75,2704 4484.96,2545.79 4484.96,2412.04 4487,2410 ; R13_1.2@4295.32,2558 4295.32,2523.68 4409,2410 4487,2410 ; ?.7@4443.7,2267 4483,2267 4521,2305 4521,2376 4487,2410
bat2_emitter: _1_3.1 T?_2.E | length 210.7
  Bottom Layer w10: _1_3.1@3696,1632.68 3711.63,1617.05 T?_2.E@3711.63,1428.4
bat2_opampM: ?.6 R13_1.1 R16_1.1 | length 472.5
  Top Layer w10: R16_1.1@4142.32,2558 R13_1.1@4210.68,2558 4210.68,2436.32 4330,2317 ?.6@4443.7,2317
bat2_opampP: ?.5 R14_1.1 R15_1.1 | length 563.3
  Top Layer w10: v1(4253,2558) 4253,2480 4366,2367 ?.5@4443.7,2367
  Bottom Layer w10: R15_1.1@4150.32,2698 R14_1.1@4224.68,2698 ; R14_1.1@4224.68,2719.68 R14_1.1@4224.68,2698 ; v1(4253,2558) 4253,2669.68 R14_1.1@4224.68,2698
Bat2VoltageSel: T?_2.B U5.40 | length 2776.5
  Top Layer w10: v1(3530,3825) 3539.37,3815.63 U5.40@3539.37,3702.76 ; v1(3785,2965) 3768,2948 3768,2422.64 3813,2377.64 3813,1505 v1(3807,1499)
  Bottom Layer w10: v1@3534,3829 v1(3530,3825) 3530,3602 3550,3582 3550,3200 v1(3785,2965) ; T?_2.B@3711.63,1353.6 3760.37,1402.34 3760.37,1452.37 v1(3807,1499)
batmon: ?.1@4649.63,4098.31 ?.2@4718.53,4098.31 U5.91 Z2.N | length 1615.5
  Top Layer w10: U5.91@3440.94,4297.24 3440.94,4393.7 3524.61,4477.36 4355.57,4477.36 Z2.N@4585.02,4247.92
  Top Layer w15.75: Z2.N@4585.02,4247.92 4649.63,4183.31 ?.1@4649.63,4098.31 ?.2@4718.53,4098.31
BatSel: ?.B@4520.63,3904.4 U5.73 | length 915.3
  Top Layer w10: U5.73@3797.24,4196.85 3917.85,4196.85 3937.54,4216.54 v1(3965.54,4216.54) ; v1(4459,3906) 4519.03,3906 ?.B@4520.63,3904.4
  Bottom Layer w10: v1(3965.54,4216.54) 4241.46,4216.54 4288,4170 4288,4077 v1(4459,3906)
Batt1pre: ?.1@5475.5,1976 R15.2 SUDZOR1.S | length 564.1
  Bottom Layer w10: R15.2@5032.32,2268 5183.5,2268 ?.1@5475.5,1976
Batt2pre: ?.1@4182.5,1976 R16_1.2 SUDZOR2.S | length 587.1
  Top Layer w10: R16_1.2@4057.68,2558 4187,2428.68 v1(4187,2025)
  Bottom Layer w10: ?.1@4182.5,1976 ?.1@4182.5,1976.5